# EAGLE board PCB 2c (EAGLE 9.0.1)
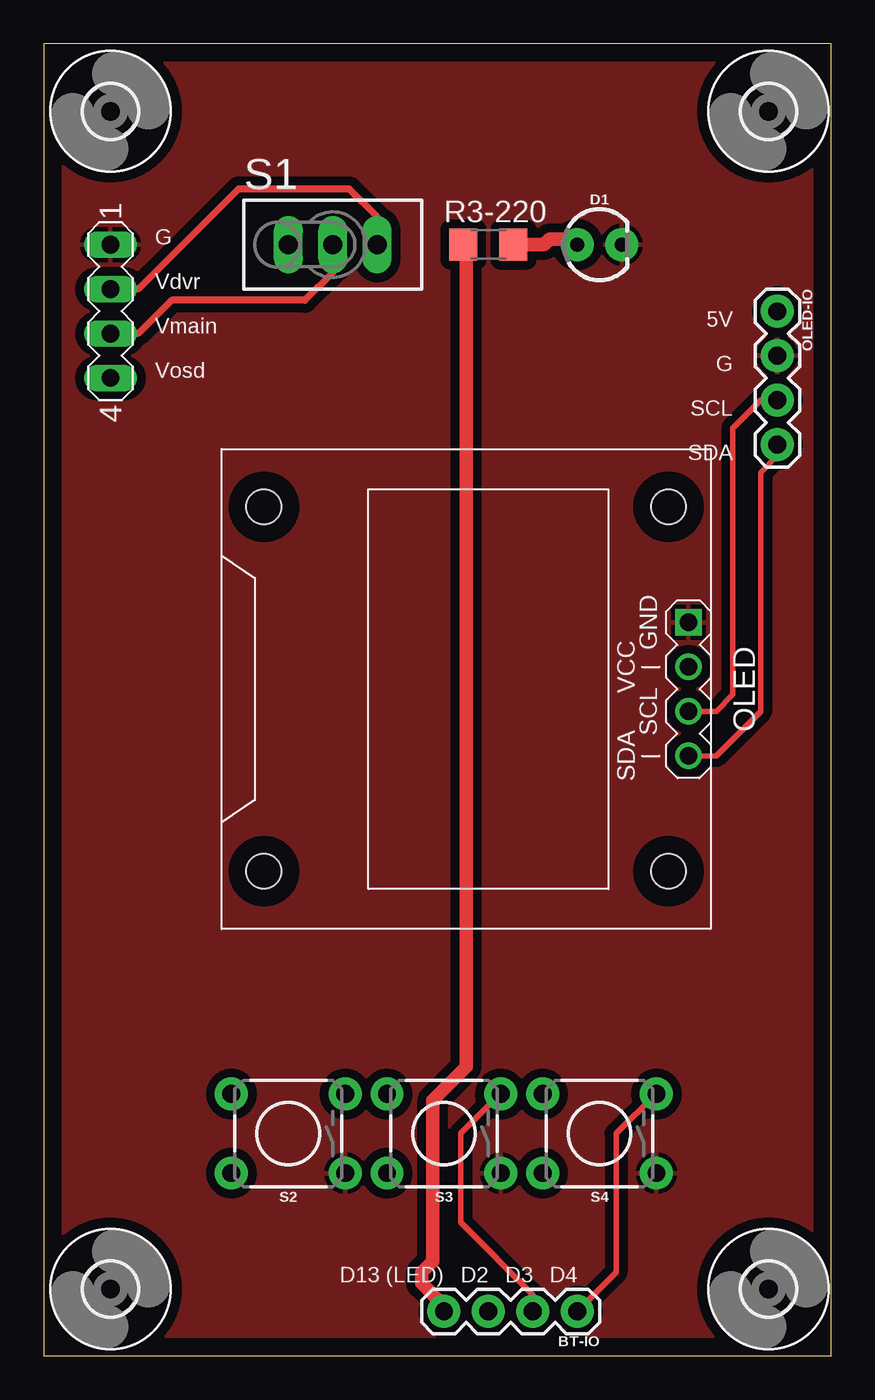
[diagram p0: board, top side]
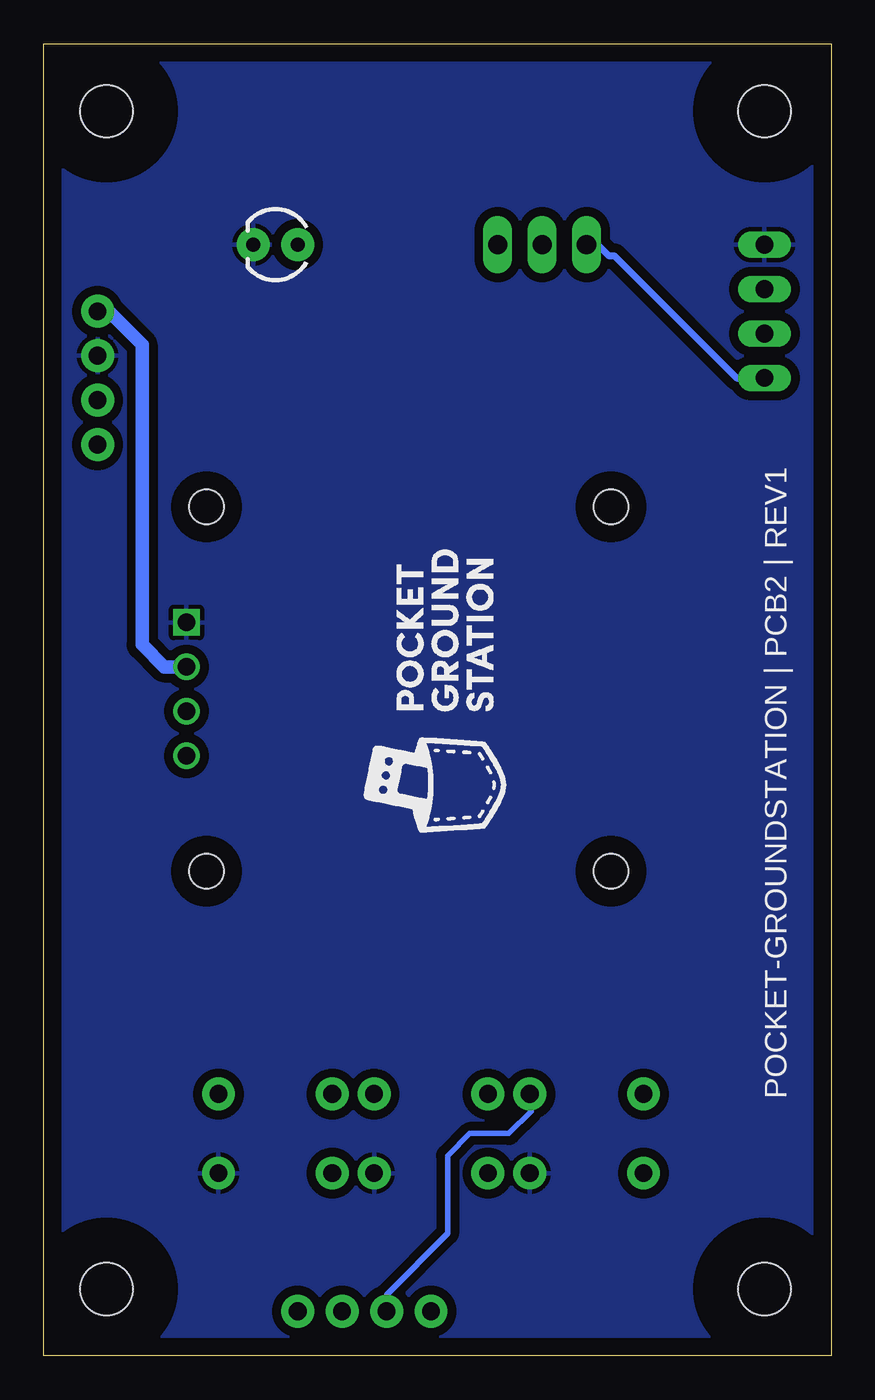
[diagram p1: board, bottom side, seen from below]

Size 44.98 x 74.98 mm. Coordinates in mm from the lower left corner, seen from the top.
Outline: 0,74.98 0,0 44.98,0 44.98,74.98 0,74.98
Copper layers (1*16): Top 0.035mm / dielectric 1.5mm / Bottom 0.035mm
Design rules "PCB Albert *": minimum track width 0.15mm, minimum drill 0.35mm, track to track 0.205mm, track to pad 0.205mm, pad to pad 0.205mm, via to via 0.205mm, smd to smd 6mil, copper to edge 40mil, drill to drill 6mil, minimum pad ring 10mil, minimum via ring 8mil, stop-mask expansion 4mil, vias tented up to drill 0mil, thermal gap 10mil
Net classes: 0 default: width 0.762 mm, drill 0.508 mm, clearance 0.508 mm; 1 thin: width 0.3 mm, drill 0.3 mm, clearance 0.3 mm; 2 medium: width 0.4 mm, drill 0.4 mm, clearance 0.4 mm

## Footprints (pad centres in the part's own frame; a part is rotated, then mirrored left to right if it is on the bottom)
1X04 = drill 1.016 pad 1.88: 1 0,0; 2 2.54,0; 3 5.08,0; 4 7.62,0
LED_3MM = drill 0.813 pad 1.88: A -1.27,0; K 1.27,0
MA04-1 = drill 1.016 long: 1 -3.81,0; 2 -1.27,0; 3 1.27,0; 4 3.81,0
DISPLAY-OLED-128X64-I2C = drill 1 square: 1 -3.81,12.7 | drill 1: 2 -1.27,12.7; 3 1.27,12.7; 4 3.81,12.7 | hole 2: -10.414,11.557; 10.414,11.557; 10.414,-11.557; -10.414,-11.557
R1206 = smd 1.6 x 1.803: 1 -1.422,0; 2 1.422,0
TL3XPO = drill 1.1 pad 1.422 long: 1 -2.54,0; 2 0,0; 3 2.54,0
TACTILE_SWITCH_PTH_6.0MM = drill 1.016 pad 1.88: 1 -3.251,2.261; 2 3.251,2.261; 3 -3.251,-2.261; 4 3.251,-2.261
3,0 = hole 3: 0,0

## Placement (x,y rotation side)
BT-IO  [1X04]  30.48,2.54 180 top
D1  [LED_3MM]  31.75,63.5 0 top
IO3  [MA04-1]  3.81,59.69 270 top
OLED  DISPLAY-OLED-128X64-I2C  [DISPLAY-OLED-128X64-I2C]  24.13,38.1 270 top
OLED-IO  [1X04]  41.91,59.69 270 top
R3-220  220  [R1206]  25.4,63.5 0 top
S1  TL32PO  [TL3XPO]  16.51,63.5 0 top
S2  MOMENTARY-SWITCH-SPST-PTH-6.0MM  [TACTILE_SWITCH_PTH_6.0MM]  13.97,12.7 180 top
S3  MOMENTARY-SWITCH-SPST-PTH-6.0MM  [TACTILE_SWITCH_PTH_6.0MM]  22.86,12.7 180 top
S4  MOMENTARY-SWITCH-SPST-PTH-6.0MM  [TACTILE_SWITCH_PTH_6.0MM]  31.75,12.7 180 top
U$2  [3,0]  41.4,3.81 180 top
U$3  [3,0]  3.81,3.81 180 top
U$4  [3,0]  41.4,71.12 180 top
U$5  [3,0]  3.81,71.12 180 top

## Library data of the parts
BT-IO OLED-IO = SparkFun-Connectors; PROD_ID: CONN-09696
D1 = SparkFun-LED; PROD_ID: DIO-08794
IO3 = con-lstb; OC_FARNELL: unknown; OC_NEWARK: unknown
OLED = diy-modules
R3-220 = resistor
S1 = switch
S2-S4 = SparkFun-Switches; PROD_ID: SWCH-08441; SF_SKU: COM-00097
U$2-U$5 = holes

## Nets
GND: D1.K IO3.1 OLED-IO.2 OLED.1 S2.1 S3.1 S4.1
N$1: D1.A R3-220.2
N$2 [thin]: BT-IO.1 S4.3
N$3 [medium]: IO3.3 S1.2
N$4: OLED-IO.1 OLED.2
N$5: BT-IO.4 R3-220.1
N$6 [thin]: OLED-IO.4 OLED.4
N$7 [thin]: OLED-IO.3 OLED.3
N$10 [medium]: IO3.2 S1.3
N$11 [thin]: BT-IO.2 S3.3
N$12 [thin]: BT-IO.3 S2.3
VIDOUT [medium]: IO3.4 S1.1

## Tracks (layer width: path | path; a pad name or v marks a point on that pad's centre or on a via)
GND
  pour Top: 0,74.93 0,-1.27 45.72,-1.27 45.72,76.2 0,76.2
  pour Bottom: -1.27,76.2 46.99,76.2 46.99,-2.54 -1.27,-2.54
N$1
  Top 0.762: R3-220.2 28.57,63.5 28.89,63.82 30.16,63.82 D1.A
N$2
  Top 0.3: BT-IO.1 32.7,4.76 32.7,12.7 34.92,14.92 S4.3
N$3
  Top 0.4: IO3.3 5.4,58.42 7.3,60.33 14.92,60.33 16.51,61.91 S1.2
N$4
  Bottom 0.762: OLED.2 38.1,39.37 39.37,40.64 39.37,57.78 41.27,59.69 OLED-IO.1
N$5
  Top 0.762: BT-IO.4 22.86,2.86 21.59,4.13 21.59,4.76 22.23,5.4 22.23,14.61 24.13,16.51 24.13,63.5 R3-220.1
N$6
  Top 0.3: OLED.4 38.42,34.29 40.96,36.83 40.96,50.48 41.91,51.44 OLED-IO.4
N$7
  Top 0.3: OLED.3 38.42,36.83 39.37,37.78 39.37,53.02 40.96,54.61 OLED-IO.3
N$10
  Top 0.4: IO3.2 5.4,60.96 11.11,66.67 17.46,66.67 19.05,65.09 S1.3
N$11
  Top 0.3: BT-IO.2 27.94,3.49 23.81,7.62 23.81,12.7 26.04,14.92 S3.3
N$12
  Bottom 0.3: BT-IO.3 25.4,3.49 21.91,6.99 21.91,11.43 20.64,12.7 18.41,12.7 17.14,13.97 17.14,14.92 S2.3
VIDOUT
  Bottom 0.4: IO3.4 5.4,55.88 12.38,62.87 12.7,62.87 13.34,63.5 S1.1

## Text on the board
tNames: G | Vdvr | 5V | Vmain | G | Vosd | SCL | SDA | D13 (LED) | D2 | D3 | D4
bNames: POCKET-GROUNDSTATION | PCB2 | REV1